# Altium PCB Analog_readout.PcbDoc
Units mm, origin at the board's own origin, x right, y up, seen from the top; angles counter-clockwise.
Board outline 84.71 x 113.66 mm, 2 copper layers (Top Layer, Bottom Layer); 109 components, 54 nets, 275 pads, 38 vias.
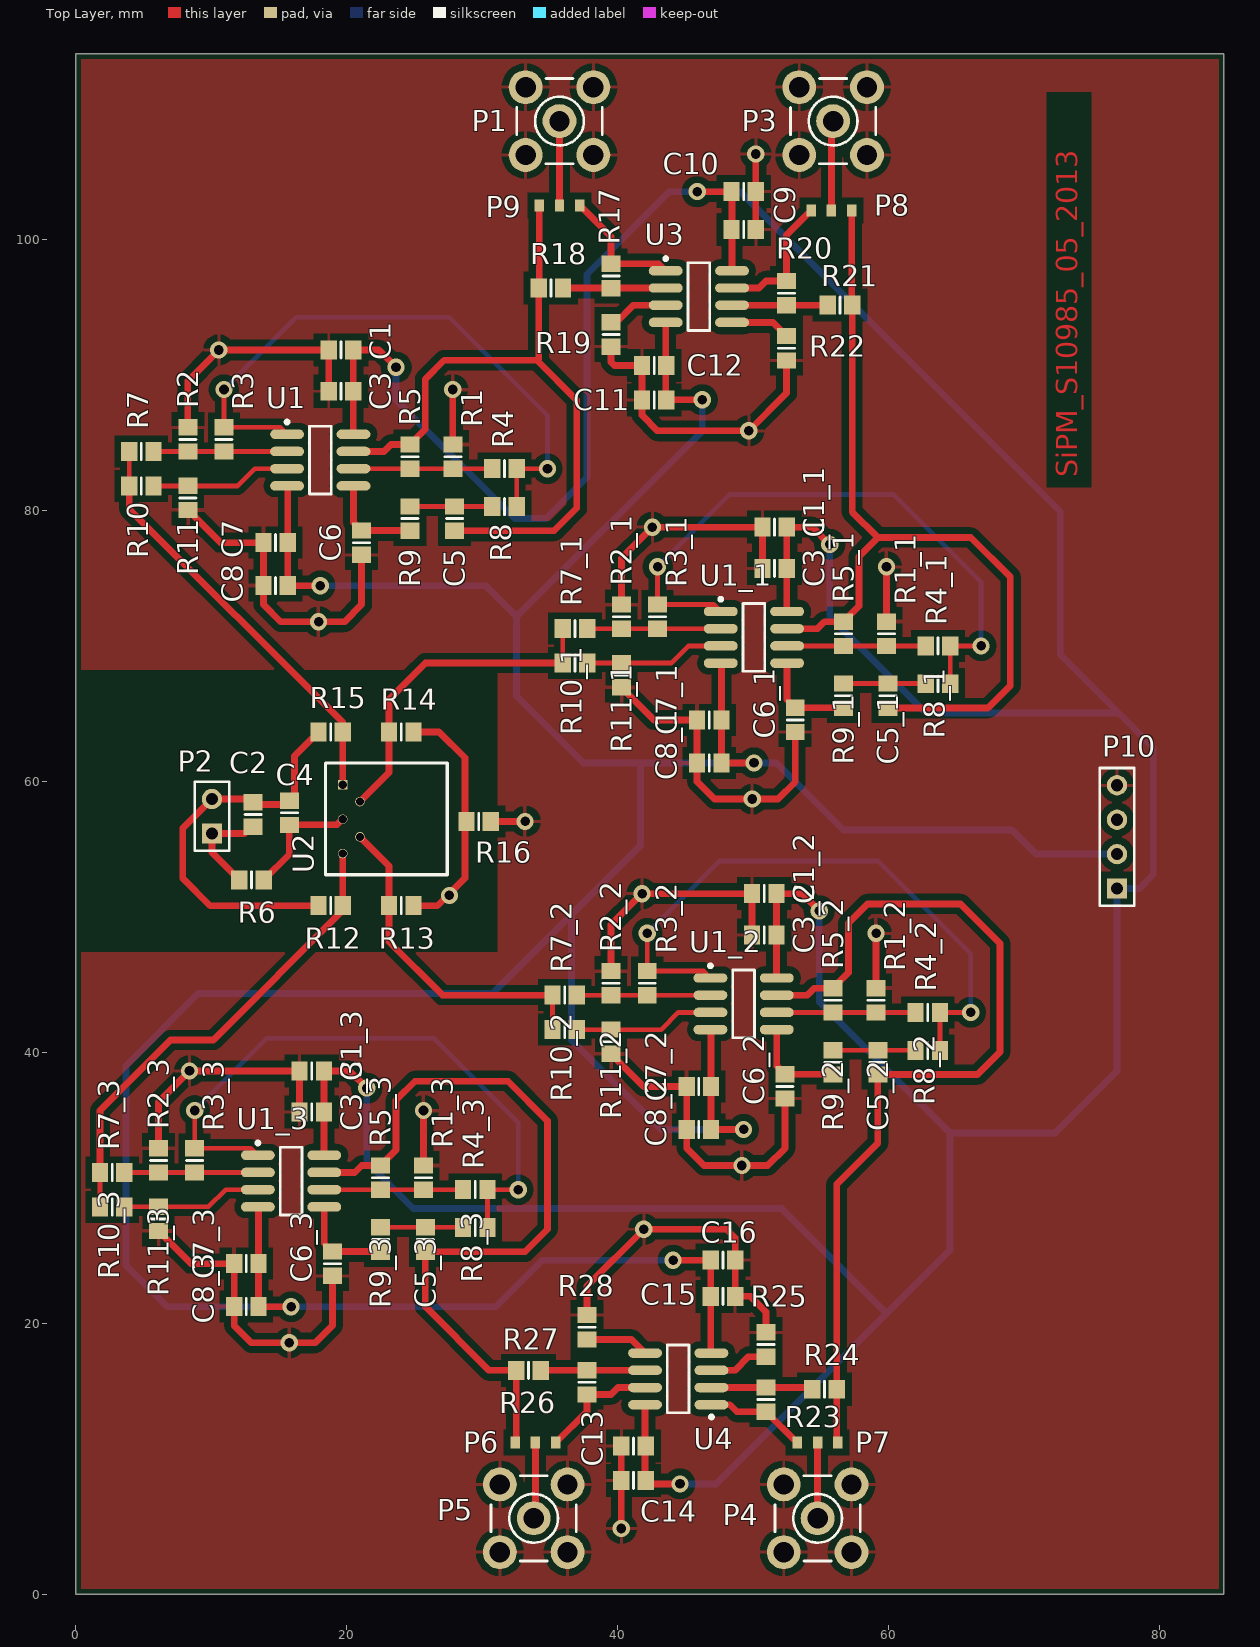
[diagram p0: Top Layer view]
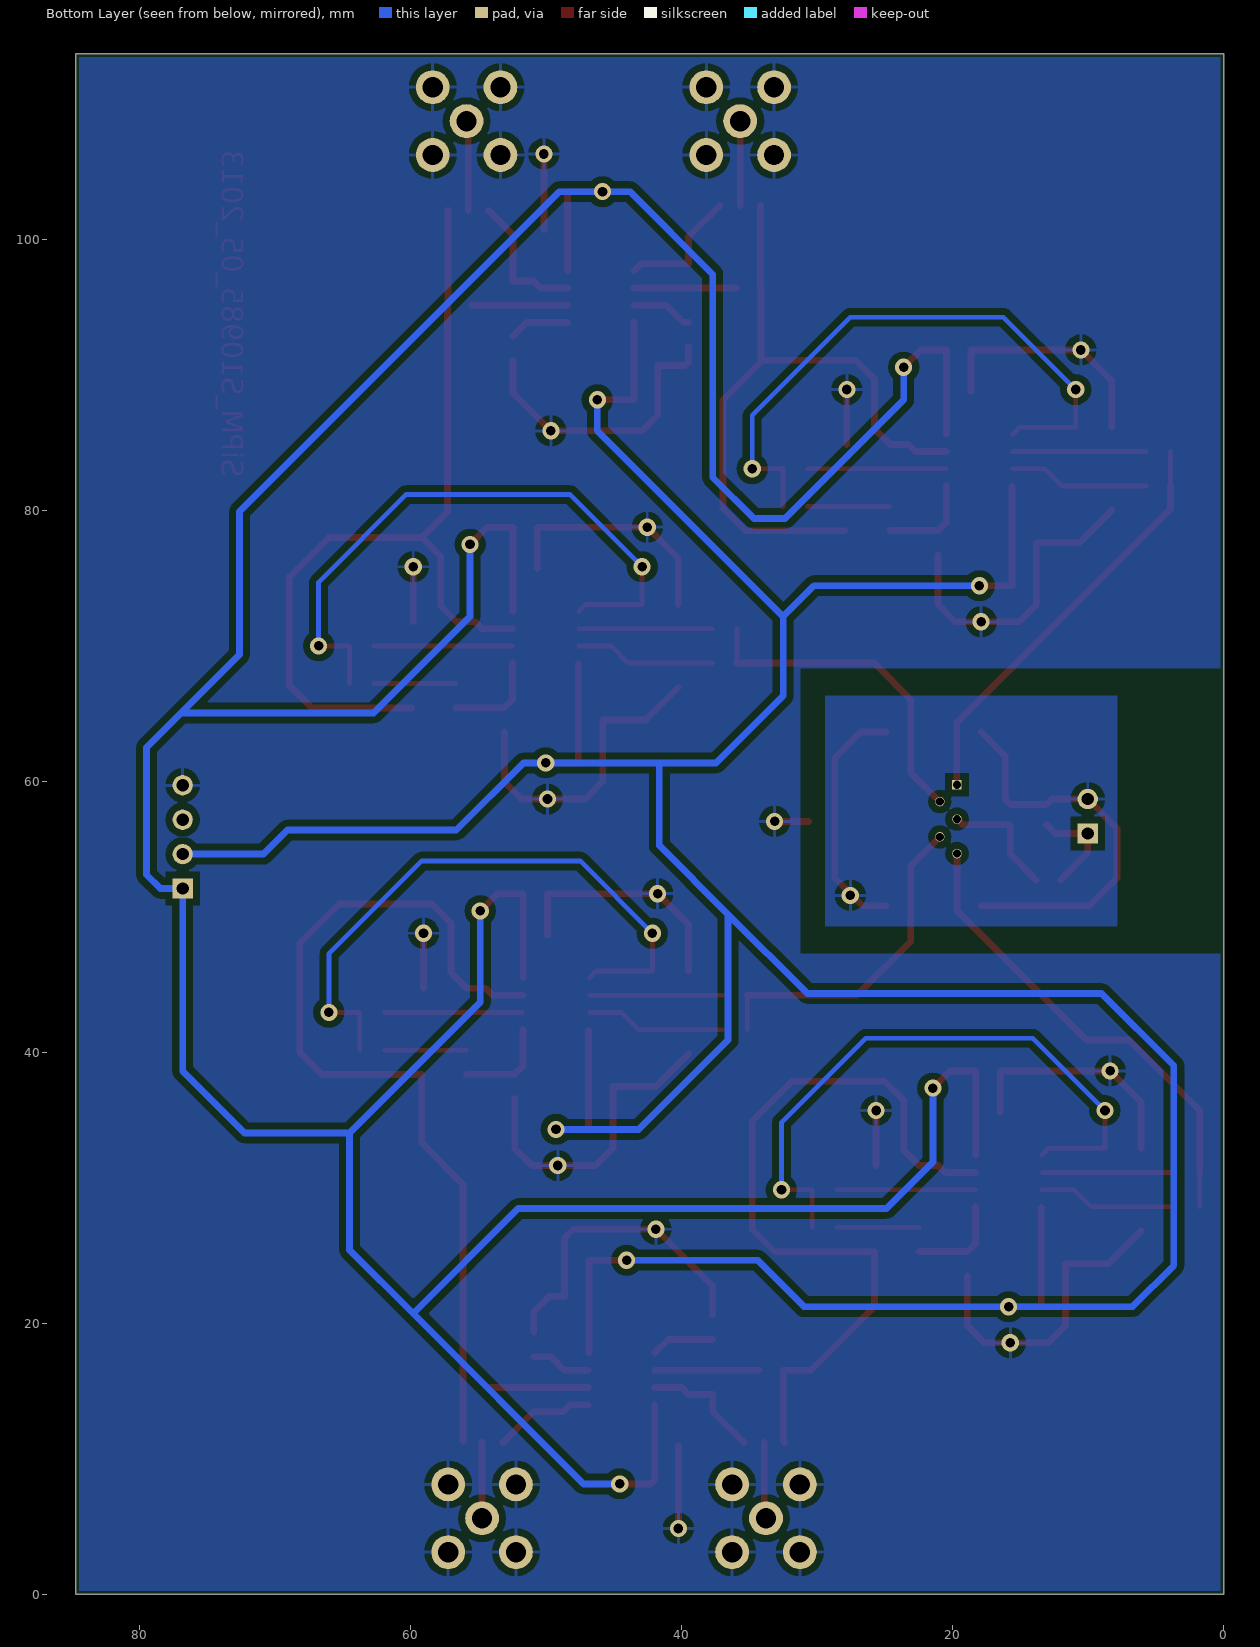
[diagram p1: Bottom Layer view, seen from below]

## Layer stack, top to bottom
Top Layer: signal copper 0.0356
Dielectric: dielectric 0.32, FR-4, Dk 4.8
Bottom Layer: signal copper 0.0356

## Board outline
0,0 84.709,0 84.709,113.665 0,113.665 0,0

## Design rules (kind name [scope] priority, off if disabled: settings)
Clearance Clearance_1 [(InNamedPolygon('gnd_bottom') OR InNamedPolygon('gnd_top') OR InNamedPolygon('70_gnd_bottom'))] p1: gap=0.5
Clearance [All] p2: gap=0.35
PolygonConnect [All] p1: connectstyle=Relief reliefconductorwidth=0.254 reliefentries=4 polygonreliefangle="90 Angle"
RoutingVias [All] p1: holewidth=1 width=1.5 viastyle="Through Hole" minholewidth=0.711 minwidth=1.27 maxholewidth=1 maxwidth=1.5
SilkscreenOverComponentPads [All] p1: minsilkscreentomaskgap=0.254
SolderMaskExpansion [All] p1: expansion=0.102
Width [(InNet('70_GND') OR InNet('+70V') OR InNet('-5') OR InNet('+5') OR InNet('GND'))] p1: maxlimit=0.5 minlimit=0.5 preferedwidth=0.5 minimp=50.000000 maximp=50.000000 favimp=50.000000
Width Width_1 [All] p2: maxlimit=0.5 minlimit=0.35 preferedwidth=0.35 minimp=50.000000 maximp=50.000000 favimp=50.000000
27 further rules are at their usual default settings.

## Classes and differential pairs
component class Analog_readout1: C1_2 C1_3 C3_2 C3_3 C5_2 C5_3 C6_2 C6_3 C7_2 C7_3 C8_2 C8_3 C13 C14 C15 C16 P4 P5 P6 P7 R1_2 R1_3 R2_2 R2_3 R3_2 R3_3 R4_2 R4_3 R5_2 R5_3 R7_2 R7_3 R8_2 R8_3 R9_2 R9_3 R10_2 R10_3 R11_2 R11_3 R23 R24 R25 R26 R27 R28 U1_2 U1_3 U4
component class Analog_readout: C1 C1_1 C2 C3 C3_1 C4 C5 C5_1 C6 C6_1 C7 C7_1 C8 C8_1 C9 C10 C11 C12 P1 P2 P3 P8 P9 P10 R1 R1_1 R2 R2_1 R3 R3_1 R4 R4_1 R5 R5_1 R6 R7 R7_1 R8 R8_1 R9 R9_1 R10 R10_1 R11 R11_1 R12 R13 R14 R15 R16 R17 R18 R19 R20 R21 R22 U1 U1_1 U2 U3

## Components (designator, comment, footprint, x,y, rotation, side; value= is the part's Value field where it differs from the comment)
C1 "Cap" 6-0805_N 19.558,91.821 r0 top
C1_1 "Cap" 6-0805_N 51.562,78.74 r0 top (schematic designator C1)
C1_2 "Cap" 6-0805_N 50.8,51.689 r0 top (schematic designator C1)
C1_3 "Cap" 6-0805_N 17.399,38.608 r0 top (schematic designator C1)
C2 "Cap" 6-0805_N 13.081,57.531 r270 top
C3 "Cap Pol3" 6-0805_N 19.558,88.773 r180 top
C3_1 "Cap Pol3" 6-0805_N 51.562,75.692 r180 top (schematic designator C3)
C3_2 "Cap Pol3" 6-0805_N 50.8,48.641 r180 top (schematic designator C3)
C3_3 "Cap Pol3" 6-0805_N 17.399,35.56 r180 top (schematic designator C3)
C4 "Cap" 6-0805_N 15.748,57.658 r270 top
C5 "Cap" 6-0805_N 27.94,79.375 r270 top
C5_1 "Cap" 6-0805_N 59.944,66.294 r270 top (schematic designator C5)
C5_2 "Cap" 6-0805_N 59.182,39.243 r270 top (schematic designator C5)
C5_3 "Cap" 6-0805_N 25.781,26.162 r270 top (schematic designator C5)
C6 "Cap" 6-0805_N 21.082,77.597 r270 top
C6_1 "Cap" 6-0805_N 53.086,64.516 r270 top (schematic designator C6)
C6_2 "Cap" 6-0805_N 52.324,37.465 r270 top (schematic designator C6)
C6_3 "Cap" 6-0805_N 18.923,24.384 r270 top (schematic designator C6)
C7 "Cap" 6-0805_N 14.732,77.597 r0 top
C7_1 "Cap" 6-0805_N 46.736,64.516 r0 top (schematic designator C7)
C7_2 "Cap" 6-0805_N 45.974,37.465 r0 top (schematic designator C7)
C7_3 "Cap" 6-0805_N 12.573,24.384 r0 top (schematic designator C7)
C8 "Cap Pol3" 6-0805_N 14.732,74.422 r0 top
C8_1 "Cap Pol3" 6-0805_N 46.736,61.341 r0 top (schematic designator C8)
C8_2 "Cap Pol3" 6-0805_N 45.974,34.29 r0 top (schematic designator C8)
C8_3 "Cap Pol3" 6-0805_N 12.573,21.209 r0 top (schematic designator C8)
C9 "Cap Pol3" 6-0805_N 49.276,100.711 r0 top
C10 "Cap" 6-0805_N 49.276,103.505 r180 top
C11 "Cap" 6-0805_N 42.672,88.138 r180 top
C12 "Cap Pol3" 6-0805_N 42.672,90.678 r0 top
C13 "Cap Pol3" 6-0805_N 41.148,10.922 r180 top
C14 "Cap" 6-0805_N 41.148,8.382 r0 top
C15 "Cap" 6-0805_N 47.752,21.971 r0 top
C16 "Cap Pol3" 6-0805_N 47.752,24.638 r180 top
P1 "SMB" SMB_V-RJ45 35.687,108.712 r90 top
P2 "Header 2" HDR1X2 10.033,56.134 r90 top
P3 "SMB" SMB_V-RJ45 55.88,108.712 r0 top
P4 "SMB" SMB_V-RJ45 54.737,5.588 r0 top
P5 "SMB" SMB_V-RJ45 33.782,5.588 r0 top
P6 "SwitchSMD_3" SwitchSMD_0603 33.909,11.176 r0 top
P7 "SwitchSMD_3" SwitchSMD_0603 54.737,11.176 r180 top
P8 "SwitchSMD_3" SwitchSMD_0603 55.753,102.108 r180 top
P9 "SwitchSMD_3" SwitchSMD_0603 35.687,102.489 r0 top
P10 "Header 4" HDR1X4 76.835,52.07 r90 top
R1 "Res3" 6-0805_N 27.813,83.947 r90 top
R1_1 "Res3" 6-0805_N 59.817,70.866 r90 top (schematic designator R1)
R1_2 "Res3" 6-0805_N 59.055,43.815 r90 top (schematic designator R1)
R1_3 "Res3" 6-0805_N 25.654,30.734 r90 top (schematic designator R1)
R2 "Res3" 6-0805_N 8.255,85.217 r90 top
R2_1 "Res3" 6-0805_N 40.259,72.136 r90 top (schematic designator R2)
R2_2 "Res3" 6-0805_N 39.497,45.085 r90 top (schematic designator R2)
R2_3 "Res3" 6-0805_N 6.096,32.004 r90 top (schematic designator R2)
R3 "Res3" 6-0805_N 10.922,85.217 r270 top
R3_1 "Res3" 6-0805_N 42.926,72.136 r270 top (schematic designator R3)
R3_2 "Res3" 6-0805_N 42.164,45.085 r270 top (schematic designator R3)
R3_3 "Res3" 6-0805_N 8.763,32.004 r270 top (schematic designator R3)
R4 "Res3" 6-0805_N 31.623,83.058 r0 top
R4_1 "Res3" 6-0805_N 63.627,69.977 r0 top (schematic designator R4)
R4_2 "Res3" 6-0805_N 62.865,42.926 r0 top (schematic designator R4)
R4_3 "Res3" 6-0805_N 29.464,29.845 r0 top (schematic designator R4)
R5 "Res3" 6-0805_N 24.638,83.947 r270 top
R5_1 "Res3" 6-0805_N 56.642,70.866 r270 top (schematic designator R5)
R5_2 "Res3" 6-0805_N 55.88,43.815 r270 top (schematic designator R5)
R5_3 "Res3" 6-0805_N 22.479,30.734 r270 top (schematic designator R5)
R6 "Res3" 6-0805_N 12.954,52.705 r180 top
R7 "Res3" 6-0805_N 4.826,84.328 r0 top
R7_1 "Res3" 6-0805_N 36.83,71.247 r0 top (schematic designator R7)
R7_2 "Res3" 6-0805_N 36.068,44.196 r0 top (schematic designator R7)
R7_3 "Res3" 6-0805_N 2.667,31.115 r0 top (schematic designator R7)
R8 "Res3" 6-0805_N 31.623,80.264 r0 top
R8_1 "Res3" 6-0805_N 63.627,67.183 r0 top (schematic designator R8)
R8_2 "Res3" 6-0805_N 62.865,40.132 r0 top (schematic designator R8)
R8_3 "Res3" 6-0805_N 29.464,27.051 r0 top (schematic designator R8)
R9 "Res3" 6-0805_N 24.638,79.375 r90 top
R9_1 "Res3" 6-0805_N 56.642,66.294 r90 top (schematic designator R9)
R9_2 "Res3" 6-0805_N 55.88,39.243 r90 top (schematic designator R9)
R9_3 "Res3" 6-0805_N 22.479,26.162 r90 top (schematic designator R9)
R10 "Res3" 6-0805_N 4.826,81.788 r0 top
R10_1 "Res3" 6-0805_N 36.83,68.707 r0 top (schematic designator R10)
R10_2 "Res3" 6-0805_N 36.068,41.656 r0 top (schematic designator R10)
R10_3 "Res3" 6-0805_N 2.667,28.575 r0 top (schematic designator R10)
R11 "Res3" 6-0805_N 8.255,80.899 r90 top
R11_1 "Res3" 6-0805_N 40.259,67.818 r90 top (schematic designator R11)
R11_2 "Res3" 6-0805_N 39.497,40.767 r90 top (schematic designator R11)
R11_3 "Res3" 6-0805_N 6.096,27.686 r90 top (schematic designator R11)
R12 "Res3" 6-0805_N 18.796,50.8 r0 top
R13 "Res3" 6-0805_N 24.003,50.8 r180 top
R14 "Res3" 6-0805_N 24.003,63.627 r180 top
R15 "Res3" 6-0805_N 18.796,63.627 r0 top
R16 "Res3" 6-0805_N 29.718,57.023 r180 top
R17 "Res3" 6-0805_N 39.497,97.282 r90 top
R18 "Res3" 6-0805_N 35.052,96.393 r0 top
R19 "Res3" 6-0805_N 39.497,92.964 r90 top
R20 "Res3" 6-0805_N 52.451,96.012 r90 top
R21 "Res3" 6-0805_N 56.388,95.123 r180 top
R22 "Res3" 6-0805_N 52.451,91.948 r90 top
R23 "Res3" 6-0805_N 50.927,14.351 r270 top
R24 "Res3" 6-0805_N 55.245,15.113 r180 top
R25 "Res3" 6-0805_N 50.927,18.415 r270 top
R26 "Res3" 6-0805_N 37.719,15.621 r270 top
R27 "Res3" 6-0805_N 33.401,16.51 r0 top
R28 "Res3" 6-0805_N 37.719,19.685 r270 top
U1 "THS4062" SO-8_M 18.034,83.693 r0 top
U1_1 "THS4062" SO-8_M 50.038,70.612 r0 top (schematic designator U1)
U1_2 "THS4062" SO-8_M 49.276,43.561 r0 top (schematic designator U1)
U1_3 "THS4062" SO-8_M 15.875,30.48 r0 top (schematic designator U1)
U2 "MPPC_S10985" S10985_HAM 18.415,53.086 r90 top
U3 "AD8002" SO-8_M 45.974,95.758 r0 top
U4 "AD8002" SO-8_M 44.45,15.875 r180 top

## Footprints (in the part's own frame and the unit in brackets; to place one, negate y for a bottom-side part, rotate by r counter-clockwise, add the part's x,y. Pads: shape width x height; smd on the part's side, far side on the other; paste and mask are expansions set on the pad)
6-0805_N [mm] "Chip Resistor, Body 2.0x1.2mm, IPC Medium Density"
  rect 1.2x1.4 smd: 1(-0.9,0) 2(0.9,0)
  silkscreen extent 0,-0.6 0,0.6, body extent -1.07,-0.7 1.07,0.7, height 0.7
HDR1X2 [mm] "Connector; Header; 2 Position"
  rect 1.5x1.5 hole 0.9: 1(0,0)
  round 1.5 hole 0.9: 2(2.54,0)
  silkscreen extent -1.27,-1.27 3.81,1.27
HDR1X4 [mm] "Connector; Header; 4 Position"
  rect 1.5x1.5 hole 0.9: 1(0,0)
  round 1.5 hole 0.9: 2(2.54,0) 3(5.08,0) 4(7.62,0)
  silkscreen extent -1.27,-1.27 8.89,1.27
S10985_HAM [mm]
  rect 0.7x0.7 hole 0.6: 1(6.64,-1.27)
  round 0.7 hole 0.6: 2(5.4,-2.54) 3(4.1,-1.27) 4(2.8,-2.54) 5(1.56,-1.27)
  silkscreen extent 0,-9 8.25,0
SMB_V-RJ45 [mm] "Connector; SMB Straight"
  round 2.5 hole 1.5: 1(0,0) 2(-2.5,-2.5) 2(-2.5,2.5) 2(2.5,-2.5) 2(2.5,2.5)
  silkscreen extent -3.15,-3.15 3.15,3.15
SO-8_M [mm] "SOIC, 8-Leads, Body 4.9x3.9mm, Pitch 1.27mm, IPC Low Density"
  oval 2.5x0.7 smd: 1(-2.45,1.905) 2(-2.45,0.635) 3(-2.45,-0.635) 4(-2.45,-1.905) 5(2.45,-1.905) 6(2.45,-0.635) 7(2.45,0.635) 8(2.45,1.905)
  silkscreen extent -2.57,-2.5 0.8,2.93, body extent -2,-2.5 2,2.5, height 1.75
SwitchSMD_0603 [mm] "3 pins 0603"
  rect 0.7x0.9 smd: 1(-1.5,0) 2(1.5,0) 3(0,0)
  body extent -1.6,-0.48 1.6,0.48, height 0.9

## Part data
C1 C1_1 C1_2 C1_3 C2 C4 C5 C5_1 C5_2 C5_3 C6 C6_1 C6_2 C6_3 C7 C7_1 C7_2 C7_3 C10 C11 C14 C15: "Capacitor"
C3 C3_1 C3_2 C3_3 C8 C8_1 C8_2 C8_3 C9 C12 C13 C16: "Polarized Capacitor (Surface Mount)"
P1 P3 P4 P5: "SMB Straight Connector"
P2: "Header, 2-Pin"
P10: "Header, 4-Pin"
R1 R1_1 R1_2 R1_3 R2 R2_1 R2_2 R2_3 R3 R3_1 R3_2 R3_3 R4 R4_1 R4_2 R4_3 R5 R5_1 R5_2 R5_3 R6 R7 R7_1 R7_2 R7_3 R8 R8_1 R8_2 R8_3 R9 R9_1 R9_2 R9_3 R10 R10_1 R10_2 R10_3 R11 R11_1 R11_2 R11_3 R12 R13 R14 R15 R16 R17 R18 R19 R20 R21 R22 R23 R24 R25 R26 R27 R28: "Resistor"
U1 U1_1 U1_2 U1_3 U3 U4: library part AD8002AR, "Dual 600MHz, 50mW Current Feedback Amplifier"

## Via types
v1: diameter 1.27, hole 0.711, Top Layer to Bottom Layer, 38 vias

## Nets (pads, with @x,y where several pads share a name; then routed paths per layer and width w, separated by ;. In a path a pad name is that pad's centre, name@x,y a point inside that pad or via, vN(x,y) a via of type N, cw(c..) or ccw(c..) an arc to the next point about the centre after c; other vN are vias at no path point)
70_GND: C2.1 C4.1 P2.2 R12.1 R13.1 R14.1 R15.1 R16.2 | length 47.8
  Top Layer w0.5: R12.1 9.906,50.8 7.874,52.832 7.874,56.515 P2.2 12.688,58.674 13.081,58.281 15.748,58.281 16.129,58.662 16.129,61.86 R15.1 ; R13.1 26.67,50.8 28.702,52.832 28.702,61.722 26.797,63.627 R14.1
  other v1: 27.559,51.562
+5: C1.2 C1_1.2 C1_2.2 C1_3.2 C3.1 C3_1.1 C3_2.1 C3_3.1 C9.1 C10.2 C13.1 C14.2 P10.1 U1.8 U1_1.8 U1_2.8 U1_3.8 U3.8 U4.8 | length 334.3
  Top Layer w0.5: U1_3.8@18.299,32.411 C1_3.2 20.193,38.608 v1(21.463,37.338) ; U1.8@20.458,85.624 C1.2 22.352,91.821 v1(23.622,90.551) ; U4.8 42,8.43 C14.2 42.302,8.128 v1(44.577,8.128) ; v1(45.847,103.505) C10.2 ; U3.8 C10.2@48.424,103.457 ; U1_2.8@51.7,45.492 C1_2.2 53.594,51.689 v1(54.864,50.419) ; U1_1.8@52.462,72.543 C1_1.2 54.356,78.74 v1(55.626,77.47)
  Bottom Layer w0.5: v1(21.463,37.338) 21.463,31.877 24.892,28.448 52.07,28.448 59.817,20.701 ; v1(23.622,90.551) 23.622,88.138 32.385,79.375 34.671,79.375 37.719,82.423 37.719,97.409 43.815,103.505 v1(45.847,103.505) 49.022,103.505 72.644,79.883 72.644,69.342 76.962,65.024 ; v1(44.577,8.128) 47.244,8.128 59.817,20.701 ; v1(54.864,50.419) 54.864,43.688 64.516,34.036 ; v1(55.626,77.47) 55.626,72.136 62.738,65.024 76.962,65.024 ; 59.817,20.701 64.516,25.4 64.516,34.036 ; 64.516,34.036 72.263,34.036 76.835,38.608 P10.1 78.486,52.07 79.502,53.086 79.502,62.484 76.962,65.024
+70V: C2.2 P2.1 R6.2 | length 7.6
  Top Layer w0.5: R6.2 10.033,54.726 P2.1 12.434,56.134 C2.2@13.081,56.781
-5: C7.2 C7_1.2 C7_2.2 C7_3.2 C8.2 C8_1.2 C8_2.2 C8_3.2 C11.1 C12.2 C15.1 C16.2 P10.2 U1.4 U1_1.4 U1_2.4 U1_3.4 U3.4 U4.4 | length 282.3
  Top Layer w0.5: U1_3.4@13.473,28.527 C7_3.2 C8_3.2 v1(15.875,21.209) ; U1.4@15.632,81.74 C7.2 C8.2 v1(18.034,74.422) ; U3.4 43.524,88.186 C11.1 v1(46.228,88.138) ; v1(44.069,24.638) C16.2 C15.1 U4.4@46.852,17.828 ; U1_2.4@46.874,41.608 C7_2.2 C8_2.2 v1(49.276,34.29) ; U1_1.4@47.636,68.659 C7_1.2 C8_1.2 v1(50.038,61.341)
  Bottom Layer w0.5: v1(18.034,74.422) 30.226,74.422 32.512,72.136 ; v1(44.069,24.638) 34.417,24.638 30.988,21.209 v1(15.875,21.209) 6.731,21.209 3.683,24.257 3.683,38.989 9.017,44.323 30.734,44.323 36.576,50.165 ; v1(46.228,88.138) 46.228,85.852 32.512,72.136 ; v1(49.276,34.29) 43.18,34.29 36.576,40.894 36.576,50.165 ; P10.2 70.866,54.61 69.088,56.388 56.642,56.388 51.689,61.341 v1(50.038,61.341) 41.656,61.341 ; 32.512,72.136 32.512,66.294 37.465,61.341 41.656,61.341 ; 36.576,50.165 41.656,55.245 41.656,61.341
GND: C1.1 C1_1.1 C1_2.1 C1_3.1 C3.2 C3_1.2 C3_2.2 C3_3.2 C6.2 C6_1.2 C6_2.2 C6_3.2 C7.1 C7_1.1 C7_2.1 C7_3.1 C8.1 C8_1.1 C8_2.1 C8_3.1 C9.2 C10.1 C11.2 C12.1 C13.2 C14.1 C15.2 C16.1 P1.2 P3.2 P4.2 P5.2 P10.4 R1.2 R1_1.2 R1_2.2 R1_3.2 R2.2 R2_1.2 R2_2.2 R2_3.2 R11.1 R11_1.1 R11_2.1 R11_3.1 R16.1 R19.1 R22.1 R25.1 R28.1 | length 239.7
  Top Layer w0.5: R11_3.1 8.498,24.384 C7_3.1 C8_3.1 11.673,19.823 12.954,18.542 v1(15.748,18.542) 17.653,18.542 18.923,19.812 C6_3.2 ; R2_3.2 6.096,36.322 v1(8.382,38.608) C1_3.1 C3_3.2 ; R11.1 10.657,77.597 C7.1 C8.1 13.832,73.036 15.113,71.755 v1(17.907,71.755) 19.812,71.755 21.082,73.025 C6.2 ; R2.2 8.255,89.535 v1(10.541,91.821) C1.1 C3.2 ; R1_3.2 v1(25.654,35.687) ; R1.2 v1(27.813,88.9) ; R16.1 v1(33.147,57.023) ; R28.1 37.719,22.733 v1(41.91,26.924) 48.006,26.924 48.652,26.278 C16.1 C15.2 49.784,21.971 50.927,20.828 R25.1 ; R11_2.1 41.899,37.465 C7_2.1 C8_2.1 45.074,32.904 46.355,31.623 v1(49.149,31.623) 51.054,31.623 52.324,32.893 C6_2.2 ; R2_2.2 39.497,49.403 v1(41.783,51.689) C1_2.1 C3_2.2 ; R19.1 39.497,90.932 39.751,90.678 C12.1 C11.2 41.772,87.006 42.926,85.852 v1(49.657,85.852) 52.451,88.646 R22.1 ; v1(40.248,4.837) C14.1 C13.2 ; R11_1.1 42.661,64.516 C7_1.1 C8_1.1 45.836,59.955 47.117,58.674 v1(49.911,58.674) 51.816,58.674 53.086,59.944 C6_1.2 ; R2_1.2 40.259,76.454 v1(42.545,78.74) C1_1.1 C3_1.2 ; C9.2 C10.1 v1(50.176,106.288) ; R1_2.2 v1(59.055,48.768) ; R1_1.2 v1(59.817,75.819)
NetC4_2: C4.2 R6.1 U2.3 | length 9
  Top Layer w0.5: R6.1 15.748,54.599 15.748,56.781 19.28,56.781 U2.3
NetC5_1: C5.1 R8.1 R9.2 | length 6.1
  Top Layer w0.35: R9.2 R8.1@30.712,80.275
NetC5_1_1: C5_1.1 R8_1.1 R9_1.2 | length 6.1
  Top Layer w0.35: R9_1.2 R8_1.1@62.716,67.194
NetC5_1_2: C5_1.2 P8.1 R5_1.1 R21.1 U1_1.7 | length 65.2
  Top Layer w0.5: U1_1.7 54.737,71.247 55.256,71.766 R5_1.1 57.785,72.909 57.785,76.581 59.182,77.978 ; R21.1@57.253,95.158 P8.1 ; R21.1 57.288,79.872 59.182,77.978 ; C5_1.2 67.299,65.394 68.961,67.056 68.961,75.057 66.04,77.978 59.182,77.978
NetC5_2: C5.2 P9.1 R5.1 R18.1 U1.7 | length 51.8
  Top Layer w0.5: U1.7 22.733,84.328 23.252,84.847 R5.1 25.781,85.99 25.781,89.662 27.178,91.059 34.036,91.059 ; C5.2 35.295,78.475 36.957,80.137 36.957,88.138 34.036,91.059 ; R18.1 34.152,91.175 34.036,91.059 ; R18.1@34.187,96.428 P9.1
NetC5_2_1: C5_2.1 R8_2.1 R9_2.2 | length 6.1
  Top Layer w0.35: R9_2.2 R8_2.1@61.954,40.143
NetC5_2_2: C5_2.2 P7.1 R5_2.1 R24.1 U1_2.7 | length 68.7
  Top Layer w0.5: U1_2.7 53.975,44.196 54.494,44.715 R5_2.1 57.023,45.858 57.023,49.53 58.42,50.927 65.278,50.927 68.199,48.006 68.199,40.005 66.537,38.343 C5_2.2 59.182,33.274 56.145,30.237 R24.1 P7.1@56.145,11.268
NetC5_3_1: C5_3.1 R8_3.1 R9_3.2 | length 6.1
  Top Layer w0.35: R9_3.2 R8_3.1@28.553,27.062
NetC5_3_2: C5_3.2 P6.1 R5_3.1 R27.1 U1_3.7 | length 58.4
  Top Layer w0.5: U1_3.7 20.574,31.115 21.093,31.634 R5_3.1 23.622,32.777 23.622,36.449 25.019,37.846 31.877,37.846 34.798,34.925 34.798,26.924 33.136,25.262 C5_3.2 25.781,21.209 30.48,16.51 R27.1 32.501,11.268 P6.1
NetC6_1: C6.1 R9.1 U1.5 | length 7.1
  Top Layer w0.5: U1.5 20.484,79.095 C6.1 24.616,78.497 R9.1
NetC6_1_1: C6_1.1 R9_1.1 U1_1.5 | length 7.1
  Top Layer w0.5: U1_1.5 52.488,66.014 C6_1.1 56.62,65.416 R9_1.1
NetC6_2_1: C6_2.1 R9_2.1 U1_2.5 | length 7.1
  Top Layer w0.5: U1_2.5 51.726,38.963 C6_2.1 55.858,38.365 R9_2.1
NetC6_3_1: C6_3.1 R9_3.1 U1_3.5 | length 7.1
  Top Layer w0.5: U1_3.5 18.325,25.882 C6_3.1 22.457,25.284 R9_3.1
NetP1_1: P1.1 P9.3 | length 6.2
  Top Layer w0.5: P9.3 P1.1
NetP3_1: P3.1 P8.3 | length 6.7
  Top Layer w0.5: P8.3 55.753,108.585 P3.1
NetP4_1: P4.1 P7.3 | length 5.6
  Top Layer w0.5: P4.1 P7.3
NetP5_1: P5.1 P6.3 | length 5.6
  Top Layer w0.5: P5.1 33.909,5.715 P6.3
NetP6_2: P6.2 R26.2 U4.7 | length 9
  Top Layer w0.5: P6.2 37.719,13.486 R26.2 39.486,14.721 40.005,15.24 U4.7
NetP7_2: P7.2 R23.2 U4.1 | length 7.5
  Top Layer w0.5: U4.1 48.26,13.97 48.779,13.451 R23.2 53.202,11.176 P7.2
NetP8_2: P8.2 R20.2 U3.7 | length 10.2
  Top Layer w0.5: U3.7 50.419,96.393 50.938,96.912 R20.2 52.451,100.306 P8.2
NetP9_2: P9.2 R17.2 U3.1 | length 9.5
  Top Layer w0.5: P9.2 39.497,100.179 R17.2 43.005,98.182 U3.1
NetR1_1: R1.1 R4.1 R5.2 U1.6 | length 10.2
  Top Layer w0.35: U1.6 24.638,83.058 R4.1
NetR1_1_1: R1_1.1 R4_1.1 R5_1.2 U1_1.6 | length 10.2
  Top Layer w0.35: U1_1.6 56.642,69.977 R4_1.1
NetR1_2_1: R1_2.1 R4_2.1 R5_2.2 U1_2.6 | length 10.2
  Top Layer w0.35: U1_2.6 55.88,42.926 R4_2.1
NetR1_3_1: R1_3.1 R4_3.1 R5_3.2 U1_3.6 | length 10.2
  Top Layer w0.35: U1_3.6 22.479,29.845 R4_3.1
NetR2_1: R2.1 R3.2 R7.2 U1.2 | length 9.9
  Top Layer w0.35: R7.2 U1.2
NetR2_1_1: R2_1.1 R3_1.2 R7_1.2 U1_1.2 | length 9.9
  Top Layer w0.35: R7_1.2 U1_1.2
NetR2_2_1: R2_2.1 R3_2.2 R7_2.2 U1_2.2 | length 9.9
  Top Layer w0.35: R7_2.2 U1_2.2
NetR2_3_1: R2_3.1 R3_3.2 R7_3.2 U1_3.2 | length 9.9
  Top Layer w0.35: R7_3.2 U1_3.2
NetR3_1: R3.1 R4.2 R8.2 U1.1 | length 45.7
  Top Layer w0.35: v1(10.922,88.9) R3.1 15.065,86.117 U1.1 ; R8.2 R4.2 v1(34.798,83.058)
  Bottom Layer w0.35: v1(10.922,88.9) 16.256,94.234 27.559,94.234 34.798,86.995 v1(34.798,83.058)
NetR3_1_1: R3_1.1 R4_1.2 R8_1.2 U1_1.1 | length 46.2
  Top Layer w0.35: v1(42.926,75.819) R3_1.1 47.069,73.036 U1_1.1 ; R8_1.2 R4_1.2 v1(66.802,69.977)
  Bottom Layer w0.35: v1(42.926,75.819) 48.26,81.153 60.325,81.153 66.802,74.676 v1(66.802,69.977)
NetR3_2_1: R3_2.1 R4_2.2 R8_2.2 U1_2.1 | length 46
  Top Layer w0.35: v1(42.164,48.768) R3_2.1 46.307,45.985 U1_2.1 ; R8_2.2 R4_2.2 v1(66.04,42.926)
  Bottom Layer w0.35: v1(42.164,48.768) 47.498,54.102 59.182,54.102 66.04,47.244 v1(66.04,42.926)
NetR3_3_1: R3_3.1 R4_3.2 R8_3.2 U1_3.1 | length 46.3
  Top Layer w0.35: v1(8.763,35.687) R3_3.1 12.906,32.904 U1_3.1 ; R8_3.2 R4_3.2 v1(32.639,29.845)
  Bottom Layer w0.35: v1(8.763,35.687) 14.097,41.021 26.416,41.021 32.639,34.798 v1(32.639,29.845)
NetR7_1: R7.1 R10.1 R15.2 U2.1 | length 31.1
  Top Layer w0.35: R10.1 R7.1
  Top Layer w0.5: R10.1 3.926,80.097 19.696,64.327 R15.2 19.696,59.737 U2.1
NetR7_1_1: R7_1.1 R10_1.1 R14.2 U2.2 | length 24.9
  Top Layer w0.35: R10_1.1 R7_1.1
  Top Layer w0.5: U2.2 23.103,60.634 R14.2 23.103,66.029 25.781,68.707 R10_1.1
NetR7_2_1: R7_2.1 R10_2.1 R13.2 U2.4 | length 24.9
  Top Layer w0.35: R10_2.1 R7_2.1
  Top Layer w0.5: U2.4 23.103,53.738 R13.2 23.103,48.144 27.051,44.196 R7_2.1
NetR7_3_1: R7_3.1 R10_3.1 R12.2 U2.5 | length 35.3
  Top Layer w0.35: R10_3.1 R7_3.1
  Top Layer w0.5: R7_3.1 1.767,35.676 6.985,40.894 10.139,40.894 19.685,50.44 U2.5
NetR10_1_2: R10_1.2 R11_1.2 U1_1.3 | length 10.4
  Top Layer w0.35: R10_1.2 43.942,68.707 45.212,69.977 U1_1.3
NetR10_2: R10.2 R11.2 U1.3 | length 10.4
  Top Layer w0.35: R10.2 11.938,81.788 13.208,83.058 U1.3
NetR10_2_2: R10_2.2 R11_2.2 U1_2.3 | length 10.4
  Top Layer w0.35: R10_2.2 43.18,41.656 44.45,42.926 U1_2.3
NetR10_3_2: R10_3.2 R11_3.2 U1_3.3 | length 10.4
  Top Layer w0.35: R10_3.2 9.779,28.575 11.049,29.845 U1_3.3
NetR17_1: R17.1 R18.2 U3.2 | length 7.6
  Top Layer w0.5: R18.2 U3.2
NetR19_2: R19.2 U3.3 | length 4.5
  Top Layer w0.5: R19.2 39.889,93.864 41.148,95.123 U3.3
NetR20_1: R20.1 R21.2 U3.6 | length 7.1
  Top Layer w0.5: U3.6 R21.2
NetR22_2: R22.2 U3.5 | length 4.4
  Top Layer w0.5: U3.5 51.446,93.853 R22.2
NetR23_1: R23.1 R24.2 U4.2 | length 7.3
  Top Layer w0.5: U4.2 R24.2@54.218,15.24
NetR25_2: R25.2 U4.3 | length 4.4
  Top Layer w0.5: U4.3 48.641,16.51 49.646,17.515 R25.2
NetR26_1: R26.1 R27.2 U4.6 | length 7.7
  Top Layer w0.5: R27.2 U4.6
NetR28_2: R28.2 U4.5 | length 4.7
  Top Layer w0.5: R28.2 40.995,18.785 U4.5
pads on no net: P10.3

## Polygon pours and split planes (outlines as drawn)
70_GND on Bottom Layer "70_gnd_bottom" (solid, remove dead copper, pour order 4): 7.874,66.283 7.874,49.343 7.814,49.283 29.414,49.283 29.414,66.283 7.825,66.283 7.814,66.294
GND on Bottom Layer "gnd_bottom" (solid, remove dead copper, pour order 9): 0.254,113.411 0.254,68.326 31.242,68.326 31.242,47.244 0.254,47.244 0.254,0.254 84.455,0.254 84.455,113.411 0.254,113.411
GND on Top Layer "gnd_top" (solid, remove dead copper, pour order 13): 0.381,113.284 0.381,68.199 31.115,68.199 31.115,47.371 0.381,47.371 0.381,0.381 84.328,0.381 84.328,113.284 0.381,113.284

## Other copper
Top Layer:
  text "SiPM_S10985_05_2013" at 73.914,82.423 h1.52 r90

## Silkscreen, mask and mechanical layers (free items; w line width, h text height)
Drill Drawing:
  the board outline again, w0.254